# Altium PCB PCB.PcbDoc (part 1 of 2)
Units mm, origin at the board's own origin, x right, y up, seen from the top; angles counter-clockwise.
Board outline 100 x 100.01 mm, 2 copper layers (Top Layer, Bottom Layer); 139 components, 84 nets, 470 pads, 423 vias.
Unrouted connection lines stored in the file: 64.
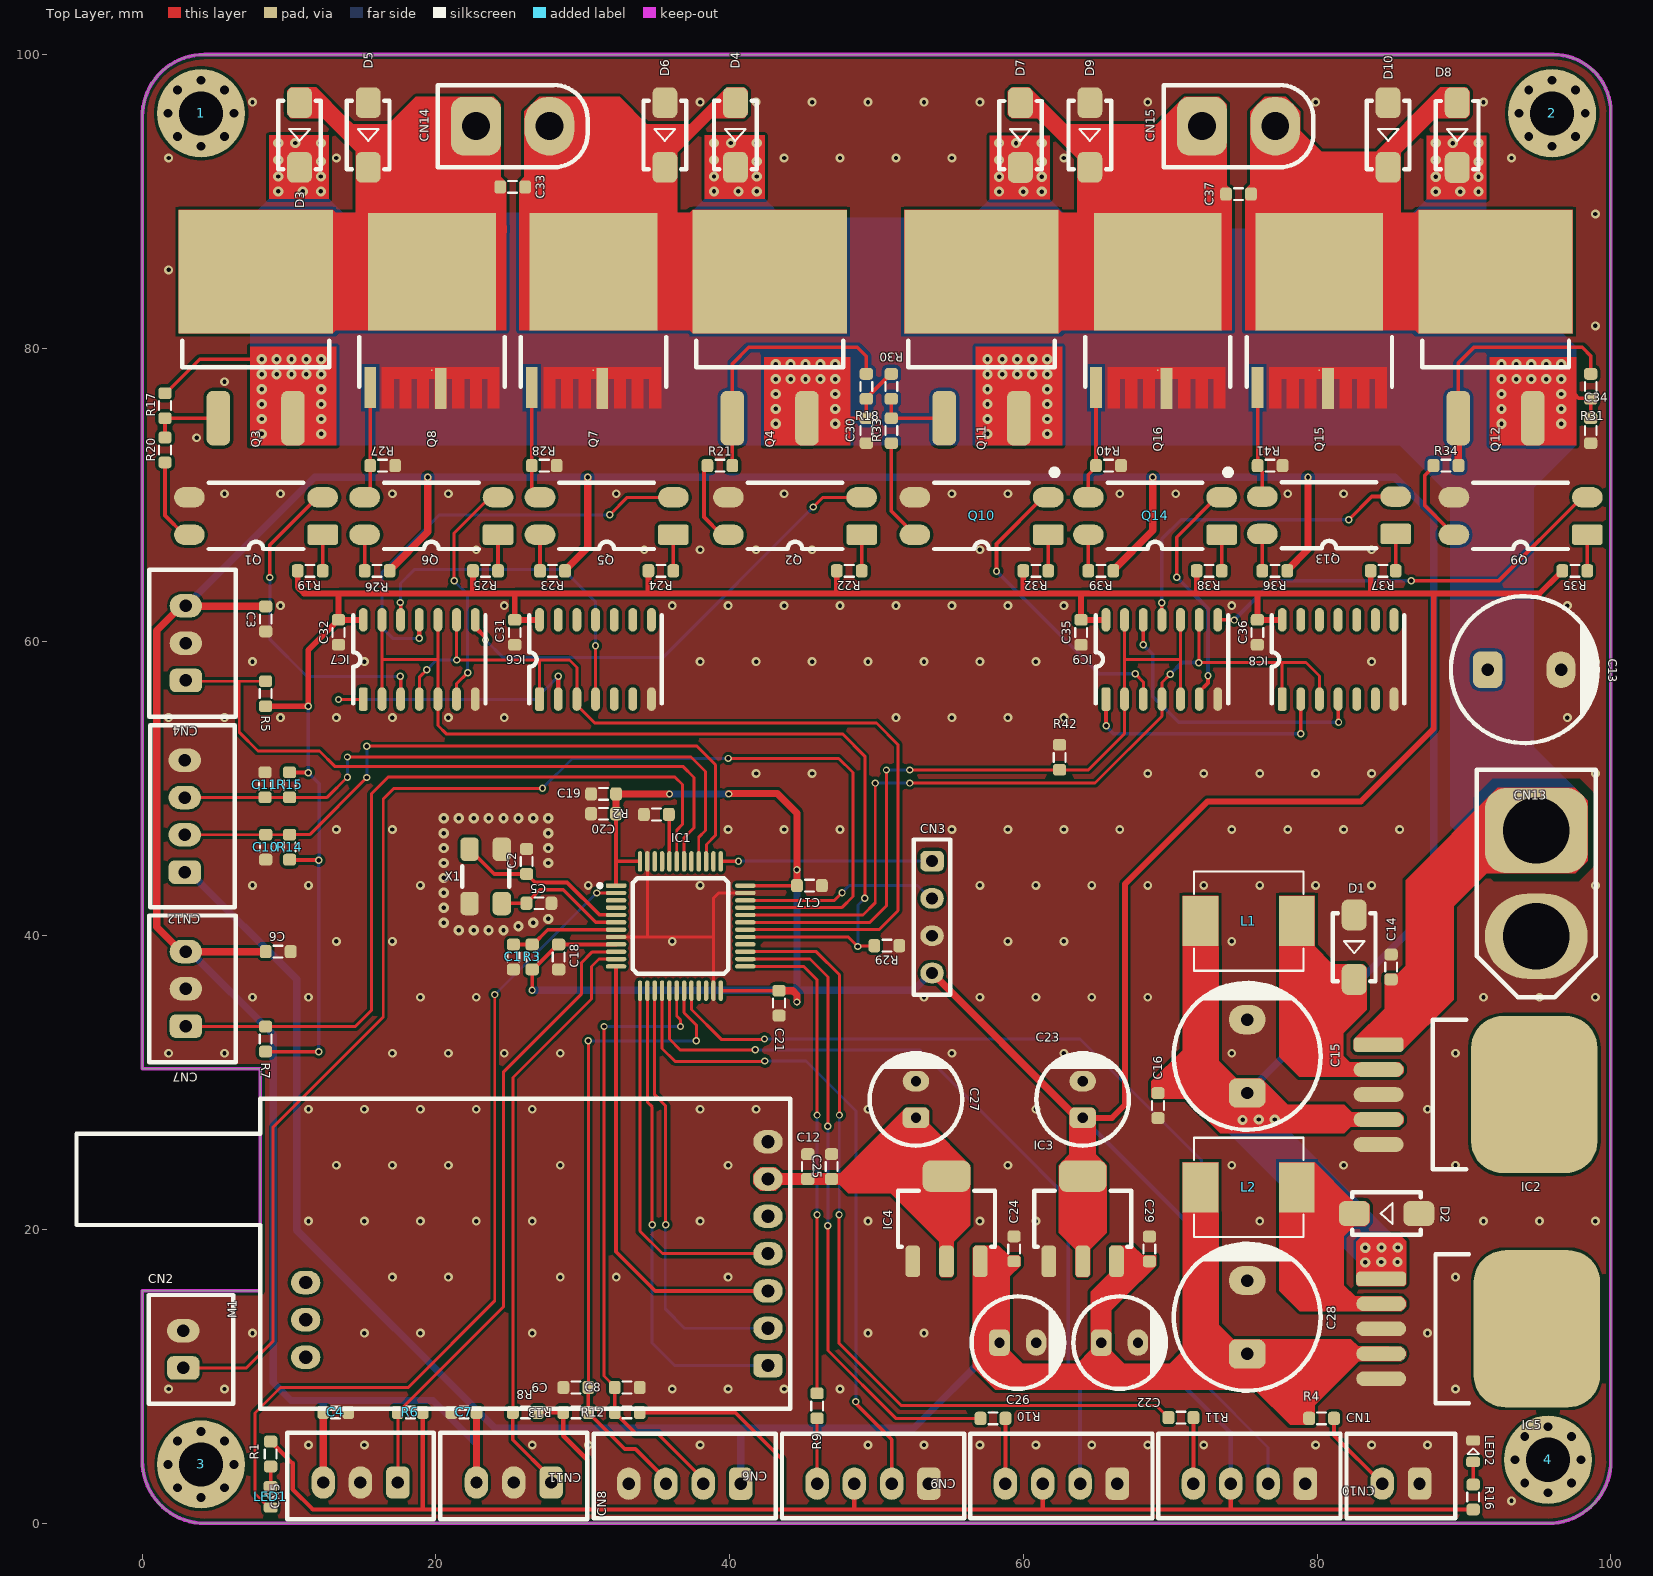
[diagram p0: Top Layer view]
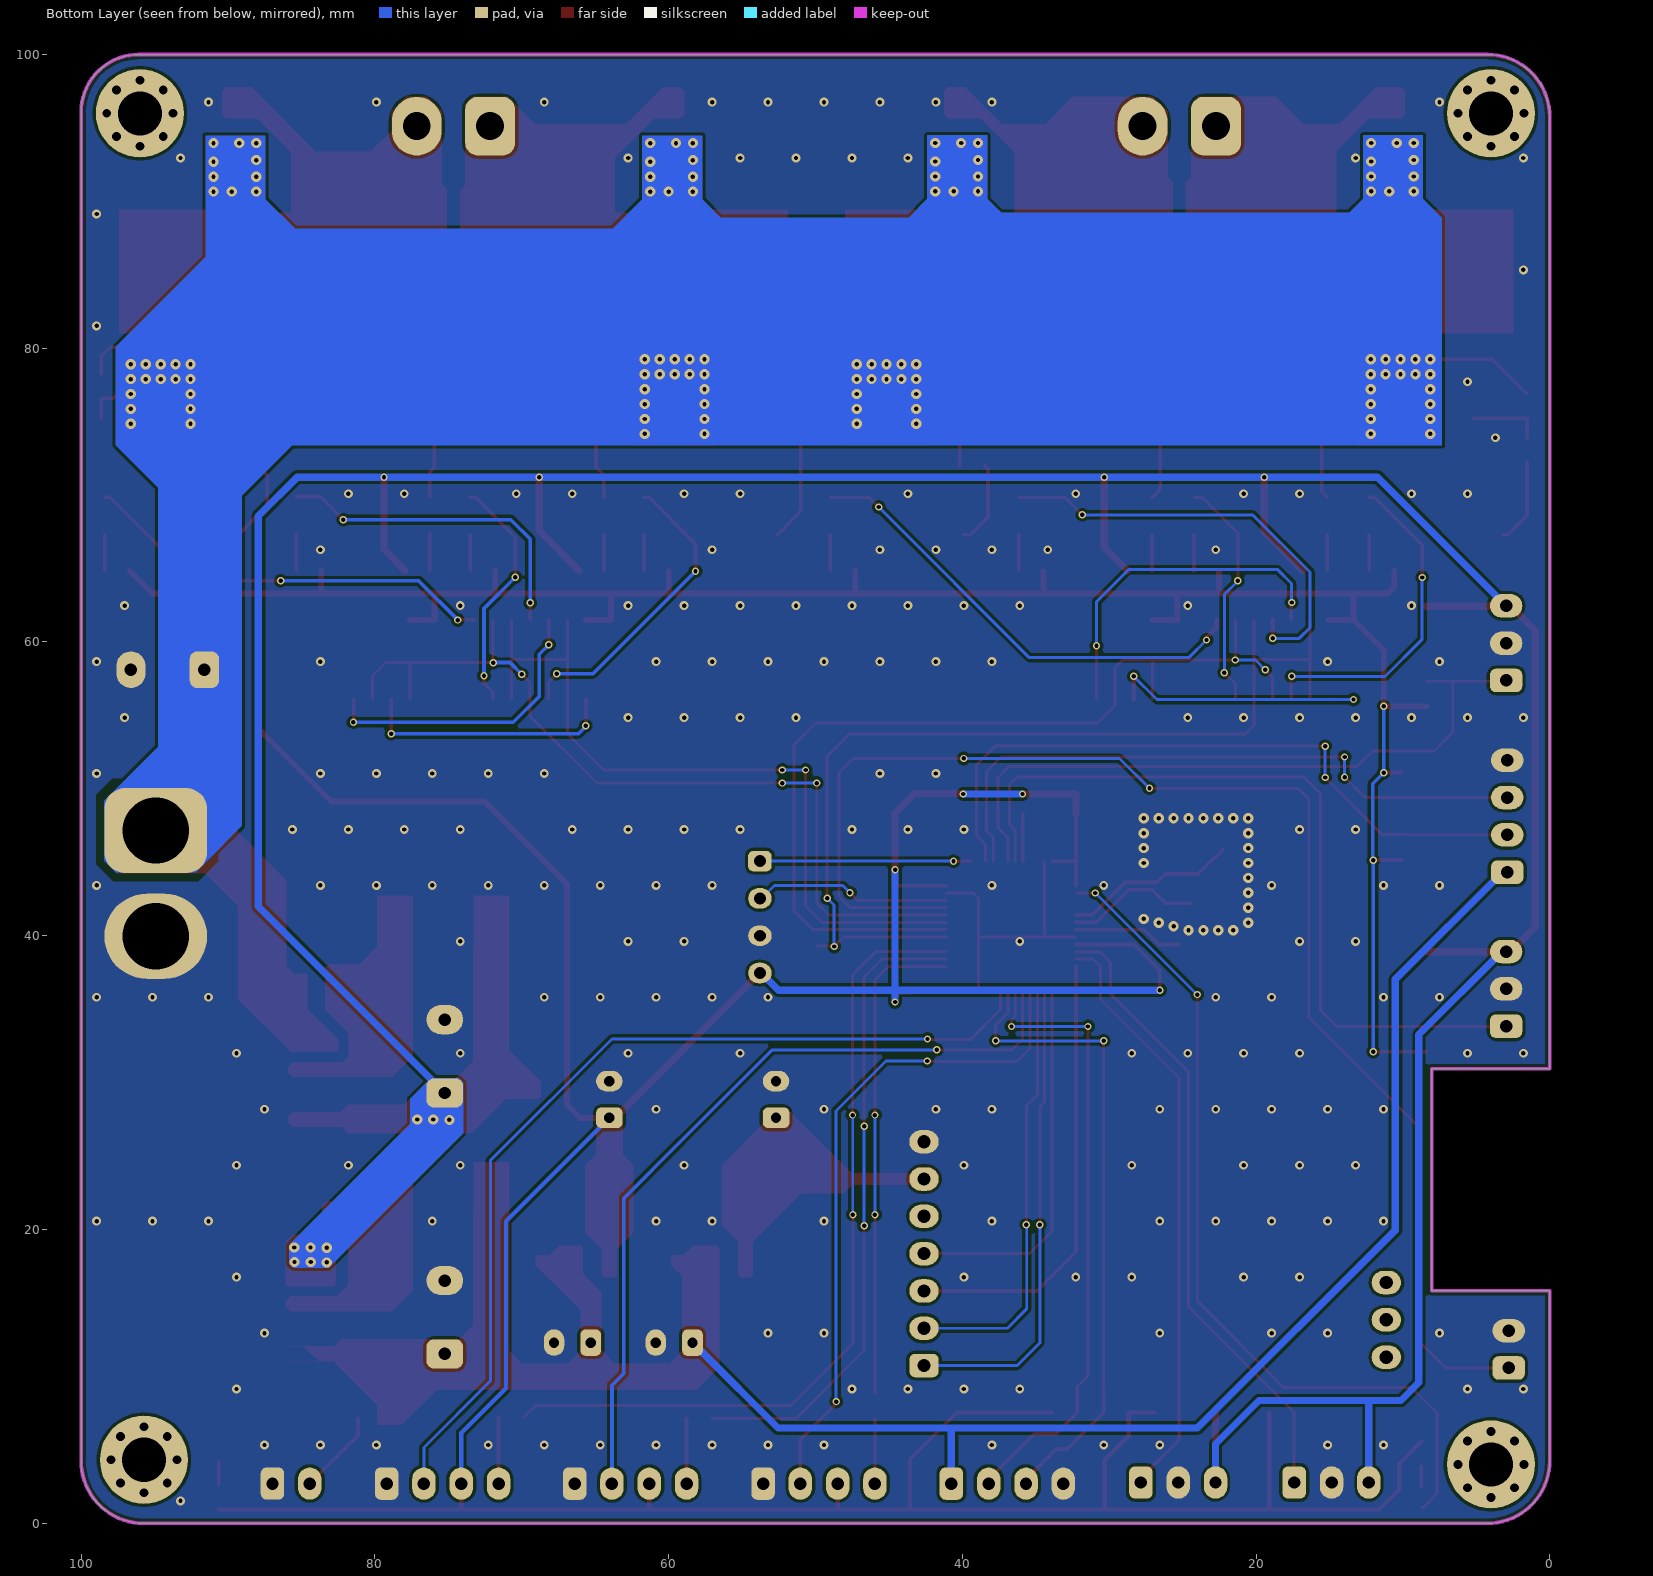
[diagram p1: Bottom Layer view, seen from below]
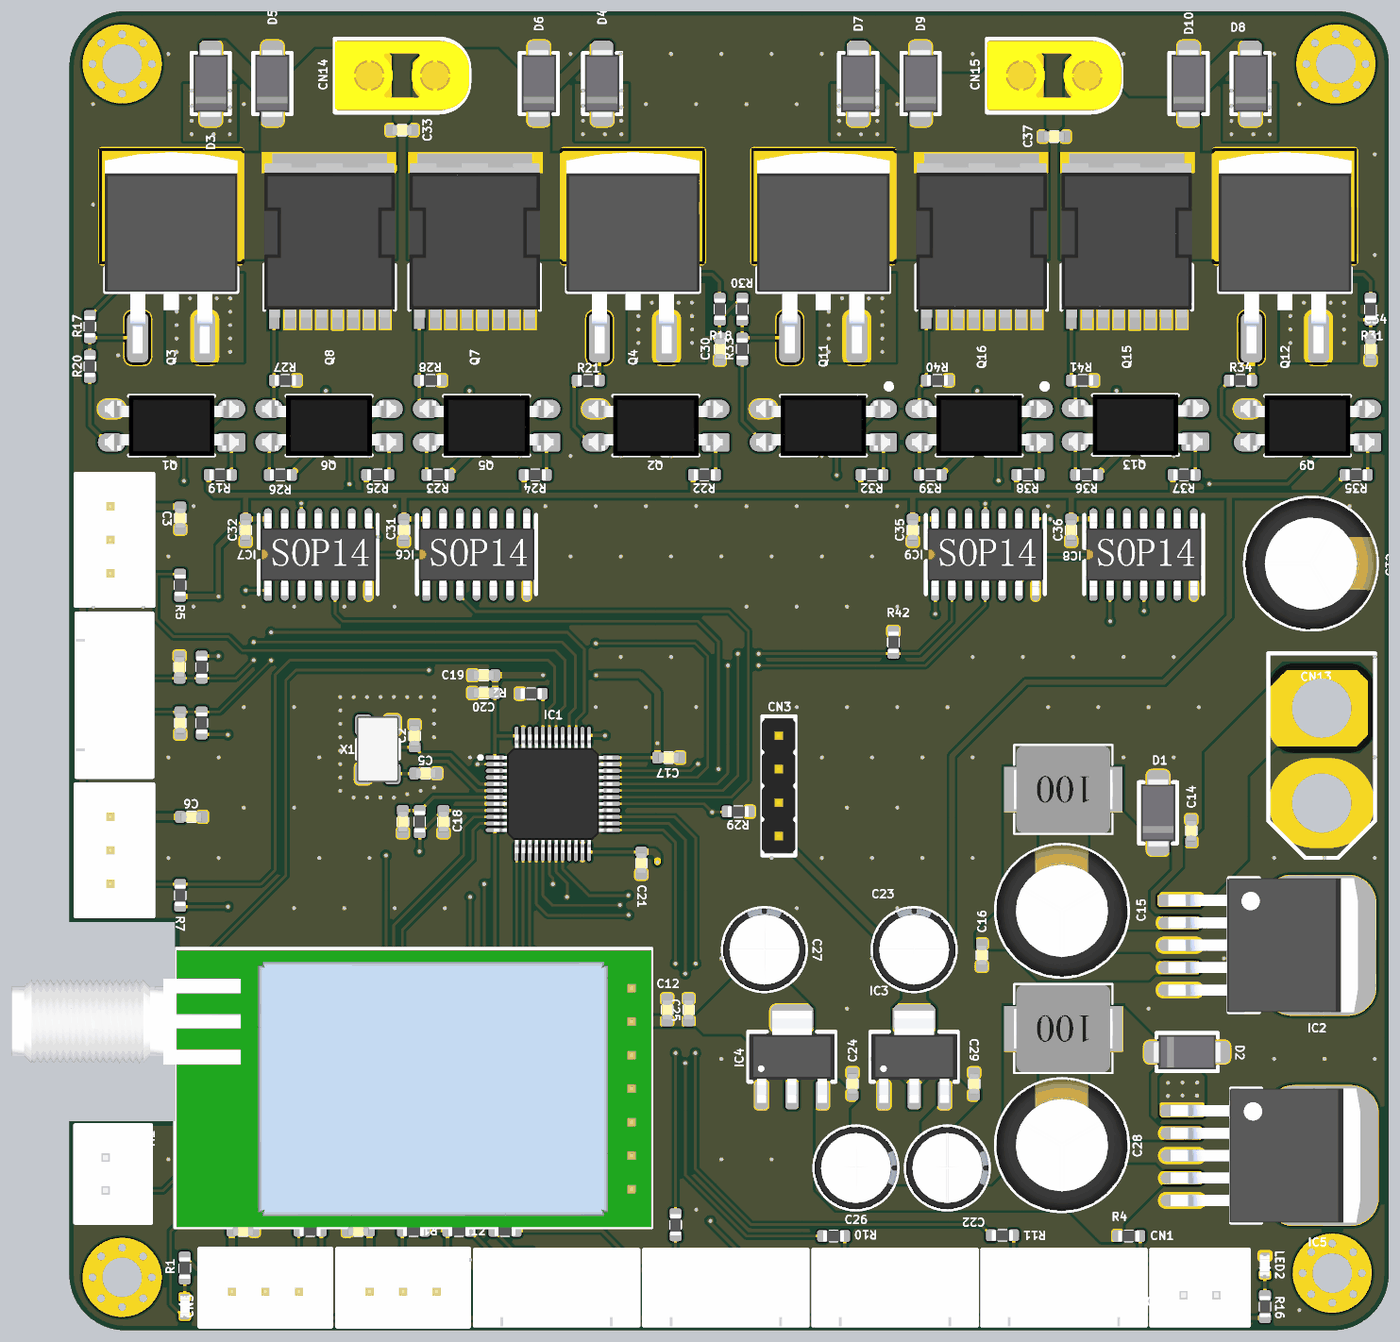
[diagram p3: 3D render of the assembled board from above, using the file's embedded part models]

## Layer stack, top to bottom
Top Solder: solder mask 0.0102, Solder Resist, Dk 3.5
Top Layer: signal copper 0.0356
Dielectric 1: dielectric 0.32, FR-4, Dk 4.8
Bottom Layer: signal copper 0.0356
Bottom Solder: solder mask 0.0102, Solder Resist, Dk 3.5

## Board outline
0,4.244 0,15.826 8.025,15.826 8.025,30.937 0,30.937 0,95.768 cw(c4.232,95.768) 4.232,100 96.086,100 cw(c96.086,96.086) 100,96.086 100,4.244 cw(c95.742,4.244) 95.742,-0.014 4.258,-0.014 cw(c4.258,4.244)

## Design rules (kind name [scope] priority, off if disabled: settings)
Clearance [All] p1: gap=0.2 ignorepadtopadclearanceinfootprint=FALSE
HoleSize [All] p1 off: absolutevalues=TRUE maxlimit=2.54 minlimit=0.025 maxpercent=80.000 minpercent=20.000
HoleToHoleClearance [All] p1 off: gap=0.254 allowstackedmicrovias=TRUE
LayerPairs [All] p1 off: enforce=TRUE
MinimumSolderMaskSliver [All] p1 off: minsoldermaskwidth=0.254
NetAntennae [All] p1 off: netantennaetolerance=0
PolygonConnect [All] p1: connectstyle=Direct reliefconductorwidth=0.254 reliefentries=4 polygonreliefangle="90 Angle" airgapwidth=0.254
RoutingVias [All] p1: holewidth=0.3 width=0.5 viastyle="Through Hole" minholewidth=0.3 minwidth=0.5 maxholewidth=0.3 maxwidth=0.5
SilkToSilkClearance [All] p1 off: silktosilkclearance=0.254
SilkToSolderMaskClearance [IsPad] p1 off: minsilkscreentomaskgap=0.254 clearancetoexposedcopper=TRUE
SolderMaskExpansion [All] p1: expansion=0.102 istentingtop=FALSE
Width Width_1 [InNetClass('PWR')] p1: maxlimit=1 minlimit=0.25 preferedwidth=0.5
Width [All] p2: maxlimit=0.5 minlimit=0.2 preferedwidth=0.25
23 further rules are at their usual default settings.

## Classes and differential pairs
component class H_BRIGGE_1: C34 C35 C36 C37 CN15 D7 D8 D9 D10 IC8 IC9 Q9 Q12 Q13 Q16 R30 R31 R32 R33 R34 R35 R36 R37 R38 R39 R40 R41 R42
component class PWR: C13 C14 C15 C16 C17 C18 C19 C20 C21 C22 C23 C24 C25 C26 C27 C28 C29 CN13 D1 D2 IC2 IC3 IC4 IC5 L1 L2 LED2 R16
component class MCU: 1 2 3 4 C1 C2 C3 C4 C5 C6 C7 C8 C9 C10 C11 C12 CN1 CN2 CN3 CN4 CN5 CN6 CN7 CN8 CN9 CN10 CN11 CN12 IC1 LED1 M1 R1 R2 R3 R4 R5 R6 R7 R8 R9 R10 R11 R12 R13 R14 R15 X1
component class H_BRIGDE: C30 C31 C32 C33 CN14 D3 D4 D5 D6 IC6 IC7 Q1 Q2 Q3 Q4 Q5 Q6 Q7 Q8 R17 R18 R19 R20 R21 R22 R23 R24 R25 R26 R27 R28 R29

## Components (designator, comment, footprint, x,y, rotation, side; value= is the part's Value field where it differs from the comment)
1 "M3" "Screw hole M3" 4,96 r90 top
2 "M3" "Screw hole M3" 96,96 r90 top
3 "M3" "Screw hole M3" 4,4 r90 top
4 "M3" "Screw hole M3" 95.722,4.318 r90 top
C1 "100nF" CAP-0603-2 25.274,38.552 r270 top
C2 "22pF" CAP-0603-2 26.17,45.054 r90 top
C3 "100nF" CAP-0603-2 8.407,61.57 r270 top
C4 "100nF" CAP-0603-2 13.169,7.537 r0 top
C5 "22pF" CAP-0603-2 27.009,42.21 r0 top
C6 "100nF" CAP-0603-2 9.25,38.919 r0 top
C7 "100nF" CAP-0603-2 21.908,7.537 r180 top
C8 "1nF" CAP-0603-2 33.02,9.237 r0 top
C9 "1nF" CAP-0603-2 29.527,9.237 r180 top
C10 "1nF" CAP-0603-2 8.407,46.032 r270 top
C11 "1nF" CAP-0603-2 8.357,50.274 r90 top
C12 "100nF" CAP-0603-2 45.314,24.283 r90 top
C13 "1000uF" Plugin,D10xL20mm 94.107,58.115 r0 top
C14 "100nF" CAP-0603-2 85.039,37.868 r90 top
C15 "1000uF" Plugin,D10xL20mm 75.235,31.79 r90 top
C16 "100nF" CAP-0603-2 69.164,28.434 r270 top
C17 "100nF" CAP-0603-2 45.427,43.41 r0 top
C18 "100nF" CAP-0603-2 28.355,38.552 r270 top
C19 "100nF" CAP-0603-2 31.411,49.652 r180 top
C20 "100nF" CAP-0603-2 31.411,48.306 r180 top
C21 "100nF" CAP-0603-2 43.358,35.41 r270 top
C22 "220uF" PLUGIN,D6.3xL12mm 66.548,12.294 r0 top
C23 "220uF" PLUGIN,D6.3xL12mm 64.033,28.849 r90 top
C24 "100nF" CAP-0603-2 59.36,18.676 r90 top
C25 "100nF" CAP-0603-2 46.939,24.283 r90 top
C26 "220uF" PLUGIN,D6.3xL12mm 59.619,12.294 r0 top
C27 "220uF" PLUGIN,D6.3xL12mm 52.68,28.849 r90 top
C28 "1000uF" Plugin,D10xL20mm 75.235,14.021 r90 top
C29 "100nF" CAP-0603-2 68.58,18.669 r90 top
C30 "100nF" CAP-0603-2 49.301,74.387 r270 top
C31 "100nF" CAP-0603-2 25.363,60.66 r270 top
C32 "100nF" CAP-0603-2 13.363,60.66 r270 top
C33 "100nF" CAP-0603-2 25.222,90.983 r180 top
C34 "100nF" CAP-0603-2 98.628,74.387 r270 top
C35 "100nF" CAP-0603-2 63.928,60.66 r270 top
C36 "100nF" CAP-0603-2 75.928,60.66 r270 top
C37 "100nF" CAP-0603-2 74.646,90.5 r180 top
CN1 "XH2.54-2P" Plugin,P=2.54mm,2P 85.7,2.698 r180 top
CN2 "XH2.54-2P" Plugin,P=2.54mm,2P 2.794,11.836 r90 top
CN3 "PH2.54-4P" "Plugin,P=2.54mm,4P,Pin Headers" 53.78,41.27 r270 top
CN4 "XH2.54-3P" Plugin,P=2.54mm,3P 2.969,59.919 r90 top
CN5 "XH2.54-3P" Plugin,P=2.54mm,3P 14.859,2.769 r180 top
CN6 "XH2.54-4P" Plugin,P=2.54mm,4P 49.759,2.692 r180 top
CN7 "XH2.54-3P" Plugin,P=2.54mm,3P 2.969,36.379 r90 top
CN8 "XH2.54-3P" Plugin,P=2.54mm,3P 25.298,2.769 r180 top
CN9 "XH2.54-4P" Plugin,P=2.54mm,4P 62.586,2.692 r180 top
CN10 "XH2.54-4P" Plugin,P=2.54mm,4P 75.387,2.692 r180 top
CN11 "XH2.54-4P" Plugin,P=2.54mm,4P 36.932,2.692 r180 top
CN12 "XH2.54-4P" Plugin,P=2.54mm,4P 2.894,48.14 r90 top
CN13 "XT60PB-M.G.Y" XT60PB-M.G.Y 94.92,43.561 r90 top
CN14 "XT30UPB-M" XT30UPB-M 25.222,95.123 r0 top
CN15 "XT30UPB-M" XT30UPB-M 74.646,95.123 r0 top
D1 "SS34" SMA(DO-214AC) 82.525,39.218 r270 top
D2 "SS34" SMA(DO-214AC) 84.725,21.082 r180 top
D3 "SS34" SMA(DO-214AC) 10.713,94.521 r270 top
D4 "SS34" SMA(DO-214AC) 40.383,94.521 r270 top
D5 "SS34" SMA(DO-214AC) 15.387,94.521 r270 top
D6 "SS34" SMA(DO-214AC) 35.583,94.521 r270 top
D7 "SS34" SMA(DO-214AC) 59.792,94.513 r270 top
D8 "SS34" SMA(DO-214AC) 89.535,94.513 r270 top
D9 "SS34" SMA(DO-214AC) 64.517,94.521 r270 top
D10 "SS34" SMA(DO-214AC) 84.836,94.521 r270 top
IC1 "STM32F103C8T6" LQFP-48(7x7) 36.661,40.66 r0 top
IC2 "LM2576S-12" TO-263-5L 89.484,29.185 r0 top
IC3 "AMS1117-3.3V" SOT-223 64.033,20.726 r90 top
IC4 "AMS1117-3.3V" SOT-223 54.762,20.726 r90 top
IC5 "LM2576S-5.0" TO-263-5L 89.662,13.233 r0 top
IC6 "74HC04" SOP-14 30.863,58.81 r90 top
IC7 "74HC00" SOP-14 18.863,58.81 r90 top
IC8 "74HC04" SOP-14 81.428,58.81 r90 top
IC9 "74HC00" SOP-14 69.428,58.81 r90 top
L1 "10uH" "Inductor 4.5A 10uH 0630" 75.336,40.996 r0 top
L2 "10uH" "Inductor 4.5A 10uH 0630" 75.336,22.86 r0 top
LED1 "RED" LED-0603 8.744,1.788 r270 top
LED2 "RED" LED-0603 90.625,4.902 r90 top
M1 "E32" E32-TTL-100 44.125,18.353 r90 top
Q1 "PC817" SOP-4 7.747,68.58 r180 top
Q2 "PC817" SOP-4 44.45,68.58 r180 top
Q3 "IRF4905S" TO-263#1 7.722,80.217 r90 top
Q4 "IRF4905S" TO-263#2 42.722,80.217 r90 top
Q5 "PC817" SOP-4 31.623,68.58 r180 top
Q6 "PC817" SOP-4 19.685,68.58 r180 top
Q7 "SFT018N100C3" TOLL 30.722,82.567 r90 top
Q8 "SFT018N100C3" TOLL 19.722,82.567 r90 top
Q9 "PC817" SOP-4 93.853,68.58 r180 top
Q10 "PC817" SOP-4 57.15,68.58 r180 top
Q11 "IRF4905S" TO-263#2 57.146,80.217 r90 top
Q12 "IRF4905S" TO-263#2 92.146,80.217 r90 top
Q13 "PC817" SOP-4 80.806,68.631 r180 top
Q14 "PC817" SOP-4 68.961,68.58 r180 top
Q15 "SFT018N100C3" TOLL 80.146,82.567 r90 top
Q16 "SFT018N100C3" TOLL 69.146,82.567 r90 top
R1 "1K" RES-0603-1 8.744,4.709 r270 top
R2 "10K" RES-0603-1 35.01,48.255 r180 top
R3 "10K" RES-0603-1 26.551,38.552 r270 top
R4 "1K" RES-0603-1 80.301,7.137 r0 top
R5 "10K" RES-0603-1 8.396,56.478 r270 top
R6 "10K" RES-0603-1 18.249,7.537 r0 top
R7 "10K" RES-0603-1 8.4,32.964 r270 top
R8 "10K" RES-0603-1 26.086,7.537 r0 top
R9 "1K" RES-0603-1 45.949,7.987 r270 top
R10 "1K" RES-0603-1 57.926,7.137 r0 top
R11 "1K" RES-0603-1 70.727,7.188 r0 top
R12 "10K" RES-0603-1 33.02,7.537 r0 top
R13 "10K" RES-0603-1 29.519,7.537 r180 top
R14 "10K" RES-0603-1 10.033,46.032 r270 top
R15 "10K" RES-0603-1 10.033,50.274 r90 top
R16 "1K" RES-0603-1 90.625,1.778 r270 top
R17 "10K" RES-0603-1 1.549,76.087 r90 top
R18 "10K" RES-0603-1 49.301,77.406 r270 top
R19 "220R" RES-0603-1 11.437,64.846 r180 top
R20 "4.7K" RES-0603-1 1.549,73.076 r90 top
R21 "4.7K" RES-0603-1 39.331,72.009 r180 top
R22 "220R" RES-0603-1 48.14,64.846 r0 top
R23 "680R" RES-0603-1 27.933,64.846 r0 top
R24 "220R" RES-0603-1 35.313,64.846 r0 top
R25 "220R" RES-0603-1 23.375,64.846 r180 top
R26 "680R" RES-0603-1 15.995,64.846 r0 top
R27 "6.8K" RES-0603-1 16.372,72.009 r180 top
R28 "6.8K" RES-0603-1 27.372,72.009 r180 top
R29 "10K" RES-0603-1 50.698,39.319 r180 top
R30 "10K" RES-0603-1 51.003,77.406 r90 top
R31 "10K" RES-0603-1 98.628,77.406 r270 top
R32 "220R" RES-0603-1 60.84,64.846 r180 top
R33 "4.7K" RES-0603-1 51.003,74.387 r90 top
R34 "4.7K" RES-0603-1 88.773,72.009 r180 top
R35 "220R" RES-0603-1 97.543,64.846 r0 top
R36 "680R" RES-0603-1 77.116,64.846 r0 top
R37 "220R" RES-0603-1 84.496,64.846 r0 top
R38 "220R" RES-0603-1 72.651,64.846 r180 top
R39 "680R" RES-0603-1 65.271,64.846 r0 top
R40 "6.8K" RES-0603-1 65.796,72.009 r180 top
R41 "6.8K" RES-0603-1 76.796,72.009 r180 top
R42 "10K" RES-0603-1 62.459,52.146 r270 top
X1 "8MHz" SMD5032-4P 23.383,44.041 r270 top

## Footprints (in the part's own frame and the unit in brackets; to place one, negate y for a bottom-side part, rotate by r counter-clockwise, add the part's x,y. Pads: shape width x height; smd on the part's side, far side on the other; paste and mask are expansions set on the pad)
CAP-0603-2 [mm]
  rrect50% 0.8x0.9 smd: 1(-0.85,0) 2(0.85,0)
  silkscreen extent -0.3,-0.4 0.3,0.4, body extent -0.8,-0.4 0.8,0.4, height 0.8
E32-TTL-100 [mm]
  rrect50% 1.6x2 hole 0.9: 1(-7.62,1.52)
  oval 1.6x2 hole 0.9: 2(-5.08,1.52) 3(-2.54,1.52) 4(0,1.52) 5(2.54,1.52) 6(5.08,1.52) 7(7.62,1.52) 8(-1.97,33) 9(-4.51,33) 10(-7.05,33)
  silkscreen extent -10.55,0 10.55,48.6, body extent -10.55,0 10.45,48.5, height 8.1
"Inductor 4.5A 10uH 0630" [mm] "4.5A 10uH ±20% 5.5A 68mO Molded Inductor SMD,7.3x6.6mm Fixed Inductors RoHS"
  rect 2.424x3.42 smd paste+0 mask+0.051: 1(3.278,0) 2(-3.278,0)
  silkscreen extent -3.73,-3.38 3.73,3.38, body extent -3.75,-3.3 3.75,3.3, height 2.85
LED-0603 [mm]
  rrect50% 0.7x0.95 smd paste-0.1: 1(-0.725,0) 2(0.725,0)
  silkscreen extent -0.2,-0.41 0.2,0.4, body extent -0.82,-0.35 0.82,0.38, height 0.68
LQFP-48(7x7) [mm]
  rrect50% 1.4x0.3 smd: 1(-4.4,2.75)
  oval 1.4x0.3 smd: 2(-4.4,2.25) 3(-4.4,1.75) 4(-4.4,1.25) 5(-4.4,0.75) 6(-4.4,0.25) 7(-4.4,-0.25) 8(-4.4,-0.75) 9(-4.4,-1.25) 10(-4.4,-1.75) 11(-4.4,-2.25) 12(-4.4,-2.75) 25(4.4,-2.75) 26(4.4,-2.25) 27(4.4,-1.75) 28(4.4,-1.25) 29(4.4,-0.75) 30(4.4,-0.25) 31(4.4,0.25) 32(4.4,0.75) 33(4.4,1.25) 34(4.4,1.75) 35(4.4,2.25) 36(4.4,2.75)
  oval 0.3x1.4 smd: 13(-2.768,-4.4) 14(-2.268,-4.4) 15(-1.768,-4.4) 16(-1.268,-4.4) 17(-0.768,-4.4) 18(-0.268,-4.4) 19(0.232,-4.4) 20(0.732,-4.4) 21(1.232,-4.4) 22(1.732,-4.4) 23(2.232,-4.4) 24(2.732,-4.4) 37(2.732,4.4) 38(2.232,4.4) 39(1.732,4.4) 40(1.232,4.4) 41(0.732,4.4) 42(0.232,4.4) 43(-0.268,4.4) 44(-0.768,4.4) 45(-1.268,4.4) 46(-1.768,4.4) 47(-2.268,4.4) 48(-2.768,4.4)
  silkscreen extent -5.6,-3.25 3.25,3.25, body extent -4.5,-4.5 4.5,4.5, height 1.6
PLUGIN,D6.3xL12mm [mm]
  rrect50% 1.4x1.8 hole 0.7: 1(-1.25,0)
  oval 1.4x1.8 hole 0.7: 2(1.25,0)
  silkscreen extent -3.15,-3.15 3.15,3.15, body extent -3.15,-3.15 3.15,3.15, height 12
Plugin,D10xL20mm [mm]
  rrect50% 2x2.5 hole 0.85 mask+0.2: 1(-2.5,0)
  oval 2x2.5 hole 0.85 mask+0.2: 2(2.5,0)
  silkscreen extent -5,-5 5,5, body extent -5,-5 5,5, height 20
Plugin,P=2.54mm,2P [mm]
  rrect50% 1.6x2.2 hole 0.85 mask+0.1: 1(-1.27,0)
  oval 1.6x2.2 hole 0.85 mask+0.1: 2(1.27,0)
  silkscreen extent -3.7,-3.4 3.7,2.35, body extent -3.71,-3.4 3.71,2.33, height 3.05
Plugin,P=2.54mm,3P [mm]
  rrect50% 1.6x2.2 hole 0.85 mask+0.1: 1(-2.54,0)
  oval 1.6x2.2 hole 0.85 mask+0.1: 2(0,0) 3(2.54,0)
  silkscreen extent -5,-3.4 5,2.5, body extent -5.04,-3.3 5.04,2.4, height 7
Plugin,P=2.54mm,4P [mm]
  rrect50% 1.6x2.2 hole 0.85 mask+0.1: 1(-3.81,0)
  oval 1.6x2.2 hole 0.85 mask+0.1: 2(-1.27,0) 3(1.27,0) 4(3.81,0)
  silkscreen extent -6.2,-3.4 6.2,2.35, body extent -6.25,-3.4 6.25,2.4, height 7
"Plugin,P=2.54mm,4P,Pin Headers" [mm]
  rrect50% 1.4x1.6 hole 0.8 mask+0.15: 1(-3.81,0)
  oval 1.4x1.6 hole 0.8 mask+0.15: 2(-1.27,0) 3(1.27,0) 4(3.81,0)
  silkscreen extent -5.28,-1.25 5.28,1.25, body extent -5.08,-1.29 5.08,1.25, height 8.89
RES-0603-1 [mm]
  rrect50% 0.8x0.9 smd: 1(-0.85,0) 2(0.85,0)
  silkscreen extent -0.3,-0.4 0.3,0.4, body extent -0.8,-0.4 0.8,0.4, height 0.45
"Screw hole M3" [mm]
  round 0.6 hole 0.6: ""(-2.25,0) ""(-1.591,1.591) ""(-1.591,-1.591) ""(0,2.25) ""(0,-2.25) ""(1.591,1.591) ""(1.591,-1.591) ""(2.25,0)
  round 6 hole 3 mask+0.1: ""(0,0)
SMA(DO-214AC) [mm]
  rrect50% 2.1x1.7 smd: 1(-2.2,0) 2(2.2,0)
  silkscreen extent -2.32,-1.45 2.32,1.45, body extent -2.6,-1.3 2.6,1.3, height 2.44
SMD5032-4P [mm]
  rrect50% 1.6x1.25 smd: 1(-1.85,-1.1) 2(1.85,-1.1) 3(1.85,1.1) 4(-1.85,1.1)
  silkscreen extent -0.7,-1.6 0.7,1.6, body extent -2.5,-1.6 2.5,1.6, height 0.85
SOP-4 [mm]
  rrect25% 2.09x1.39 smd: 1(-4.54,1.27)
  oval 2.09x1.39 smd: 2(-4.54,-1.27) 3(4.54,-1.27) 4(4.54,1.27)
  silkscreen extent -3.22,-2.25 3.22,2.25, body extent -5.08,-2.3 5.08,2.3, height 3.78
SOP-14 [mm]
  rrect50% 1.6x0.6 smd: 1(-2.7,3.81)
  oval 1.6x0.6 smd: 2(-2.7,2.54) 3(-2.7,1.27) 4(-2.7,0) 5(-2.7,-1.27) 6(-2.7,-2.54) 7(-2.7,-3.81) 8(2.7,-3.81) 9(2.7,-2.54) 10(2.7,-1.27) 11(2.7,0) 12(2.7,1.27) 13(2.7,2.54) 14(2.7,3.81)
  silkscreen extent -3,-4.51 3,4.51, body extent -3.12,-4.38 3.12,4.38, height 1.39
SOT-223 [mm]
  rrect50% 2.15x1 smd: 1(-2.9,2.3) 2(-2.9,0) 3(-2.9,-2.3)
  rrect50% 2.15x3.25 smd: 4(2.9,0)
  silkscreen extent -1.9,-3.3 1.9,3.3, body extent -3.5,-3.25 3.5,3.25, height 1.8
TO-263#1 [mm]
  rrect50% 3.7x1.6 smd mask+0.3: 1(-4.98,2.54) 3(-4.98,-2.54)
  rect 8.4x10.5 smd paste-5 mask+0.3: ""(5,0)
  silkscreen extent -1.5,-5 0.3,5, body extent -6.15,-5.03 9.09,5.03, height 4.83
TO-263#2 [mm]
  rrect50% 3.7x1.6 smd mask+0.3: 1(-4.98,2.54) 3(-4.98,-2.54)
  rect 8.4x10.5 smd paste-5 mask+0.3: 2(5,0)
  silkscreen extent -1.5,-5 0.3,5, body extent -6.15,-5.03 9.09,5.03, height 4.83
TO-263-5L [mm]
  rrect50% 3.4x1 smd paste-0.05 mask+0.15: 1(-5.3,3.4)
  oval 3.4x1 smd paste-0.05 mask+0.15: 2(-5.3,1.7) 3(-5.3,0) 4(-5.3,-1.7) 5(-5.3,-3.4)
  rrect50% 8.6x10.7 smd paste-0.05 mask+0.07: 6(5.3,0)
  silkscreen extent -1.61,-5.08 0.68,5.08, body extent -6.18,-5.08 8.18,5.08, height 4.65
TOLL [mm]
  rect 2.8x0.8 smd: 1(-5.25,4.2) 2(-5.3,-0.6)
  rect 0.1x0.1 smd paste-1 mask+0: 2(-4.05,0) 3(0,0)
  rect 8x8.7 smd: 3(2.65,0)
  Top Layer region: -3.85,-4.6 -6.65,-4.6 -6.65,-3.8 -4.65,-3.8 -4.65,-3.4 -6.65,-3.4 -6.65,-2.6 -4.65,-2.6 -4.65,-2.2 -6.65,-2.2 -6.65,-1.4 -4.65,-1.4 -4.65,-1 -6.65,-1 -6.65,-0.2 -4.65,-0.2 -4.65,0.2 -6.65,0.2 -6.65,1 -4.65,1 -4.65,1.4 -6.65,1.4 -6.65,2.2 -4.65,2.2 -4.65,2.6 -6.65,2.6 -6.65,3.4 -3.85,3.4
  Top Layer region: 6.65,-5.05 5.25,-5.05 5.25,-4.35 2.35,-4.35 2.35,-4.85 -1.35,-4.85 -1.35,4.85 2.35,4.85 2.35,4.35 5.25,4.35 5.25,5.05 6.65,5.05
  silkscreen extent -5.2,-4.95 -1.8,4.95, body extent -5.79,-4.95 5.89,4.95, height 2.31
XT30UPB-M [mm]
  rrect50% 3.4x4 hole 1.9: 1(-2.5,0)
  oval 3.4x4 hole 1.9: 2(2.5,0)
  silkscreen extent -5.1,-2.8 5.1,2.8, body extent -5.1,-2.6 5.1,2.6, height 10.7
XT60PB-M.G.Y [mm]
  rrect50% 5.8x7 hole 4.5 mask+0.5: 1(3.6,0)
  oval 5.8x7 hole 4.5 mask+0.5: 2(-3.6,0)
  silkscreen extent -7.75,-4.05 7.75,4.05, body extent -8,-4 8,4, height 16.1

## Part data
1 2 3 4: library part "Screw hole M3"
C1 C3 C4 C6 C7 C12 C14 C16 C17 C18 C19 C20 C21 C24 C25 C29 C30 C31 C32 C33 C34 C35 C36 C37: library part CL10B104KB8NNNC, "100nF ±10% 50V Ceramic Capacitor X7R 0603", DigiKey Part Number=1276-1000-2-ND, LCSC Part #=C1591, Manufacturer="Samsung Electro-Mechanics", Package=0603, ComponentLink1Description=Link, ComponentLink1URL=https://www.lcsc.com/product-detail/C1591.html?s_z=n_CL10B104KB8NNC, ComponentLink2Description="Link 1", ComponentLink2URL=https://www.digikey.com/en/products/detail/samsung-electro-mechanics/CL10B104KB8NNNC/3886658?s=N4IgTCBcDaIMIBkCMAGAQqgLAaTQDgDki4QBdAXyA, Mfr.Part #=CL10B104KB8NNNC
C2 C5: library part CC0603JRNPO9BN220, "22pF ±5% 50V Ceramic Capacitor NP0 0603", DigiKey Part Number=311-1062-2-ND, LCSC Part #=C105620, Manufacturer=YAGEO, Package=0603, ComponentLink1Description=Link, ComponentLink1URL=https://www.lcsc.com/product-detail/C105620.html?s_z=n_CC0603JRNPO9BN220, ComponentLink2Description="Link 1", ComponentLink2URL=https://www.digikey.com/en/products/detail/yageo/CC0603JRNPO9BN220/302796?s=N4IgTCBcDaIMJwAwDZEGYBSAlAcgBQHkBOAIRzDERAF0BfIA, Mfr.Part #=CC0603JRNPO9BN220
C8 C9 C10 C11: library part CC0603KRX7R9BB102, "1nF ±10% 50V Ceramic Capacitor X7R 0603", DigiKey Part Number=311-1080-2-ND, LCSC Part #=C100040, Manufacturer=YAGEO, Package=0603, ComponentLink1Description=Link, ComponentLink1URL=https://www.lcsc.com/product-detail/C100040.html?s_z=n_C100040, ComponentLink2Description="Link 1", ComponentLink2URL=https://www.digikey.com/en/products/detail/yageo/CC0603KRX7R9BB102/302814?s=N4IgTCBcDaIMJwAwDZEGYDSAlAGgdiwE4AhYgRkQgF0BfIA, Mfr.Part #=CC0603KRX7R9BB102
C13 C15 C28: library part 35PX1000MEFC10X20, "1000uF 35V Aluminum Electrolytic Capacitors Through Hole,D10xL20mm 2000hrs@105℃", DigiKey Part Number=1189-1745-ND, LCSC Part #=C136014, Manufacturer=Rubycon, Package="Through Hole,D10xL20mm", ComponentLink1Description=Link, ComponentLink1URL=https://www.lcsc.com/product-detail/C136014.html?s_z=n_35PX1000MEFC10X20, ComponentLink2Description="Link 1", ComponentLink2URL=https://www.digikey.com/en/products/detail/rubycon/35PX1000MEFC10X20/3563769?s=N4IgTCBcDaIMwFYAKANAjABiwWQKIDEBhTFMDEAXQF8g, Mfr.Part #=35PX1000MEFC10X20, So_Chan_Cam=2
C22 C23 C26 C27: library part 25YXJ220M6.3X11, "220uF 25V Aluminum Electrolytic Capacitors Through Hole,D6.3xL11mm 7000hrs@105℃", DigiKey Part Number=1189-2913-ND, LCSC Part #=C88729, Manufacturer=Rubycon, Package="Through Hole,D6.3xL11mm", ComponentLink1Description=Link, ComponentLink1URL=https://www.lcsc.com/product-detail/C88729.html, ComponentLink2Description="Link 1", ComponentLink2URL=https://www.digikey.com/en/products/detail/rubycon/25YXJ220M6-3X11/3563124?s=N4IgTCBcDa4KwE0AaApMYAMBZAbAOgGYkBGYkAXQF8g, Mfr.Part #=25YXJ220M6.3X11
CN1 CN2: library part BX-XH2.54-2PZZ, "Connector Header 2 position 2.5mm Pitch 3A Through Hole -25℃~+85℃", DigiKey Part Number=NO, LCSC Part #=C18077833, Manufacturer=Bossie, Package="Through Hole,P=2.5mm", ComponentLink1Description=Link, ComponentLink1URL=https://www.lcsc.com/product-detail/C18077833.html?s_z=n_BX-XH2.54-2PZZ, Mfr.Part #=BX-XH2.54-2PZZ
CN3: library part PH2.54-1X4P-H25, "Pin Header 4 Position 2.54mm Pitch Single Row Through Hole -40℃~+105℃", DigiKey Part Number=NO, LCSC Part #=C42431808, Manufacturer=JXTCONN, Package=Plugin,P=2.54mm, Mfr.Part #=PH2.54-1X4P-H25
CN4 CN5 CN7 CN8: library part BX-XH2.54-3PZZ, "Connector Header 3 position 2.5mm Pitch 3A Through Hole -25℃~+85℃", DigiKey Part Number=NO, LCSC Part #=C18077834, Manufacturer=Bossie, Package="Through Hole,P=2.5mm", ComponentLink1Description=Link, ComponentLink1URL=https://www.lcsc.com/product-detail/C18077834.html?s_z=n_BX-XH2.54-3PZZ, Mfr.Part #=BX-XH2.54-3PZZ
CN6 CN9 CN10 CN11 CN12: library part BX-XH2.54-4PZZ, "Connector Header 4 position 2.5mm Pitch 3A Through Hole -25℃~+85℃", DigiKey Part Number=NO, LCSC Part #=C18077835, Manufacturer=Bossie, Package="Through Hole,P=2.5mm", ComponentLink1Description=Link, ComponentLink1URL=https://www.lcsc.com/product-detail/C18077835.html?s_z=n_BX-XH2.54-4PZZ, Mfr.Part #=BX-XH2.54-4PZZ
CN13: "Power Connectors RoHS", DigiKey Part Number=NO, LCSC Part #=C19268037, Manufacturer="Changzhou Amass Elec", Package="Through Hole", ComponentLink1Description=Link, ComponentLink1URL=https://www.lcsc.com/product-detail/C19268037.html?s_z=n_xt60, ComponentLink2Description="Link 1", Mfr.Part #=XT60PB-M.G.Y
CN14 CN15: "Banana and Tip Connector Adapters", DigiKey Part Number=NO, LCSC Part #=C428721, Manufacturer="Changzhou Amass Elec", Mfr.Part #=XT30PW-M30.G.Y, Package="Through Hole", ComponentLink1Description=Link, ComponentLink1URL=https://www.lcsc.com/product-detail/C431092.html?s_z=n_xt30, ComponentLink2Description="Link 1"
D1 D2 D3 D4 D5 D6 D7 D8 D9 D10: "Diode Independent 40V 3A Surface Mount SMA(DO-214AC)", DigiKey Part Number=NO, LCSC Part #=C908680, Manufacturer=GOODWORK, Package=SMA(DO-214AC), ComponentLink1Description=Link, ComponentLink1URL=https://www.lcsc.com/product-detail/C908680.html?s_z=n_C908680, Mfr.Part #=SS34
IC1: "ARM Cortex-M3 32 Bit 72MHz 37 LQFP-48(7x7) Microcontrollers RoHS", DigiKey Part Number=497-6063-ND, LCSC Part #=C8734, Manufacturer=ST, Package=LQFP-48(7x7), ComponentLink1Description=Link, ComponentLink1URL=https://www.lcsc.com/product-detail/C8734.html?s_z=n_STM32F103C8T6, ComponentLink2Description="Link 1", ComponentLink2URL=https://www.digikey.com/en/products/detail/stmicroelectronics/STM32F103C8T6/1646338, Mfr.Part #=STM32F103C8T6
IC2: "Buck Switching Regulator IC Fixed 12V 1 Output 3A TO-263-5L", DigiKey Part Number=NO, LCSC Part #=C22386541, Manufacturer="HXY MOSFET", Package=TO-263-5L, Mfr.Part #=LM2576S-12
IC3 IC4: "Linear Voltage Regulator IC Positive Fixed 1 Output 1A SOT-223", DigiKey Part Number=NO, LCSC Part #=C5120765, Manufacturer=MSKSEMI, Package=SOT-223, ComponentLink1Description=Link, ComponentLink1URL=https://www.lcsc.com/product-detail/C5120765.html?s_z=n_C5120765, Mfr.Part #=AMS1117-3.3V
IC5: "47kHz~58kHz Buck Adjustable 3.5A 5V TO-263-5L Voltage Regulators - DC DC Switching Regulators RoHS", DigiKey Part Number=NO, LCSC Part #=C5349983, Manufacturer="HXY MOSFET", Package=TO-263-5L, ComponentLink1Description=Link, ComponentLink1URL=https://www.lcsc.com/product-detail/C5349983.html?s_z=n_LM2576S-5.0, ComponentLink2Description="Link 1", Mfr.Part #=LM2576S-5.0
IC6 IC8: library part SN74HC04DR, "2V~6V 16ns@6V,50pF 2uA 6 1 SOIC-14 Gates and Inverters RoHS", DigiKey Part Number=296-1189-2-ND, LCSC Part #=C6811, Manufacturer=TI, Package=SOIC-14, ComponentLink1Description=Link, ComponentLink1URL=https://www.lcsc.com/product-detail/C6811.html?s_z=n_74HC04, ComponentLink2Description="Link 1", ComponentLink2URL=https://www.digikey.com/en/products/detail/texas-instruments/SN74HC04DR/276832, Mfr.Part #=SN74HC04DR
IC7 IC9: library part SN74HC00DR, "2uA 2V~6V 15ns@6V,50pF SOIC-14 Gates and Inverters RoHS", DigiKey Part Number=296-1187-2-ND, LCSC Part #=C10090, Manufacturer=TI, Package=SOIC-14, ComponentLink1Description=Link, ComponentLink1URL=https://www.lcsc.com/product-detail/C10090.html?s_z=n_74hc00, ComponentLink2Description="Link 1", ComponentLink2URL=https://www.digikey.com/en/products/detail/texas-instruments/SN74HC00DR/276830, Mfr.Part #=SN74HC00DR
L1 L2: library part "Inductor 4.5A 10uH 0630", "4.5A 10uH ±20% 5.5A 68mΩ Molded Inductor SMD,7.3x6.6mm Fixed Inductors RoHS", LCSC Part #=C128692, Manufacturer="Shun Xiang Nuo", MPN=SMMS0630-100M, ComponentLink1Description=Link, ComponentLink1URL=https://www.lcsc.com/product-detail/C128692.html?s_z=n_q_l_inductor%25200630&spm=wm.fly.bg.1.xh___wm.fly.tp.0.ml&lcsc_vid=Q1VfX1ReRFFaUFJSRgIIUV0CFFgIBFJfT1hdVlwEEVkxVlNRTlNdX1VST1JcVTsOAxUeFF5JWBYZEEoKFBINSQcJGk4%3D, Key Attributes="FIXED IND 10uH 68mΩ SMD,6.6x7.3mm", Link=https://www.lcsc.com/product-detail/C128692.html?s_z=n_q_l_inductor%25200630&spm=wm.fly.bg.1.xh___wm.fly.tp.0.ml&lcsc_vid=Q1VfX1ReRFFaUFJSRgIIUV0CFFgIBFJfT1hdVlwEEVkxVlNRTlNdX1VST1JcVTsOAxUeFF5JWBYZEEoKFBINSQcJGk4%3D, Packaging=SMD,7.3x6.6mm
LED1 LED2: library part YLED0603R, "25mA 1.8V~2.4V Red 0603 LED Indication - Discrete ROHS", DigiKey Part Number=NO, LCSC Part #=C19171390, Manufacturer=YONGYUTAI, Package=0603, ComponentLink1Description=Link, ComponentLink1URL=https://www.lcsc.com/product-detail/C19171390.html?s_z=n_C19171390, ComponentLink2Description="Link 1", Mfr.Part #=YLED0603R
M1: library part E32-TTL-100, "E32-TTL-100 is a 100mW wireless transceiver module with LoRa / spread-spectrum technology, operates at 410~441MHz (Default: 433MHz), based on original imported RFIC SX1278 from SEMTECH", DigiKey Part Number=NO, Manufacturer="Chengdu Ebyte Electronic", Package="Through Hole,P=2.54mm", ComponentLink1Description=Link, ComponentLink1URL=https://nshopvn.com/product/module-rf-sx1278-lora-e32/, LCSC Part #=NO, Mfr.Part #=E32-TTL-100
Q1 Q2 Q5 Q6 Q9 Q10 Q13 Q14: library part PC817C-S, "Phototransistor Output 5kVrms 1 Channel SOP-4-2.54mm", DigiKey Part Number=NO, LCSC Part #=C3008369, Manufacturer=UMW, Package=SOP-4-2.54mm, ComponentLink1Description=Link, ComponentLink1URL=https://www.lcsc.com/product-detail/C3008369.html?s_z=n_C3008369, ComponentLink2Description="Link 1", Mfr.Part #=PC817C-S
Q3 Q4 Q11 Q12: library part IRF4905STRLPBF, "P-Channel 55V 70A 170W Surface Mount D2PAK", DigiKey Part Number=IRF4905STRLPBFTR-ND, LCSC Part #=C2620, Manufacturer=Infineon, Package=D2PAK, ComponentLink1Description=Link, ComponentLink1URL=https://www.lcsc.com/product-detail/C2620.html?s_z=n_IRF4905S, ComponentLink2Description="Link 1", ComponentLink2URL=https://www.digikey.com/en/products/detail/infineon-technologies/IRF4905STRLPBF/1928283?s=N4IgTCBcDaIJICUBiAWAnABgKwGUAqCAMgAoBCSIAugL5A, Mfr.Part #=IRF4905STRLPBF
Q7 Q8 Q15 Q16: "N-Channel 100V 320A 312W Surface Mount TOLL", DigiKey Part Number=NO, LCSC Part #=C42395330, Manufacturer=SCILICON, Package=TOLL, ComponentLink1Description=Link, ComponentLink1URL=https://www.lcsc.com/product-detail/C42395330.html?s_z=n_c42395330, ComponentLink2Description="Link 1", Mfr.Part #=SFT018N100C3
R1 R4 R9 R10 R11 R16: library part RC0603FR-071KL, "100mW 1kΩ 75V Thick Film Resistor ±100ppm/℃ ±1% 0603 Chip Resistor - Surface Mount RoHS", DigiKey Part Number=311-1.00KHRTR-ND, LCSC Part #=C22548, Manufacturer=YAGEO, Package=0603, ComponentLink1Description=Link, ComponentLink1URL=https://www.lcsc.com/product-detail/C22548.html?s_z=n_C22548, ComponentLink2Description="Link 1", ComponentLink2URL=https://www.digikey.com/en/products/detail/yageo/RC0603FR-071KL/726843?s=N4IgTCBcDaIEoGEAMA2JBmAYnAtEg7AIwDSAMiALoC%2BQA, Mfr.Part #=RC0603FR-071KL
R2 R3 R5 R6 R7 R8 R12 R13 R14 R15 R17 R18 R29 R30 R31 R42: library part RC0603FR-0710KL, "100mW 10kΩ 75V Thick Film Resistor ±100ppm/℃ ±1% 0603 Chip Resistor - Surface Mount RoHS", DigiKey Part Number=311-10.0KHRTR-ND, LCSC Part #=C98220, Manufacturer=YAGEO, Package=0603, ComponentLink1Description=Link, ComponentLink1URL=https://www.lcsc.com/product-detail/C98220.html?s_z=n_C98220, ComponentLink2Description="Link 1", ComponentLink2URL=https://www.digikey.com/en/products/detail/yageo/RC0603FR-0710KL/726880?s=N4IgTCBcDaIMwEYEFoEAYB0aDSAJASgCr7IByAIiALoC%2BQA, Mfr.Part #=RC0603FR-0710KL
R19 R22 R24 R25 R32 R35 R37 R38: library part 0603WAF2200T5E, "220Ω ±1% 100mW 0603 Thick Film Resistor", DigiKey Part Number=NO, LCSC Part #=C22962, Manufacturer=UNI-ROYAL, Package=0603, ComponentLink1Description=Link, ComponentLink1URL=https://www.lcsc.com/product-detail/C22962.html?s_z=n_0603waf22, ComponentLink2Description="Link 1", Mfr.Part #=0603WAF2200T5E
R20 R21 R33 R34: library part RC0603FR-074K7L, "100mW 4.7kΩ 75V Thick Film Resistor ±100ppm/℃ ±1% 0603 Chip Resistor - Surface Mount RoHS", DigiKey Part Number=311-4.70KHRTR-ND, LCSC Part #=C99782, Manufacturer=YAGEO, Package=0603, ComponentLink1Description=Link, ComponentLink1URL=https://www.lcsc.com/product-detail/C99782.html?s_z=n_4.7K, ComponentLink2Description="Link 1", ComponentLink2URL=https://www.digikey.com/en/products/detail/yageo/RC0603FR-074K7L/727212?s=N4IgTCBcDaIEoGEAMA2JBmAYnAtEg7ACwDS%2BAMiALoC%2BQA, Mfr.Part #=RC0603FR-074K7L
R23 R26 R36 R39: library part FRC0603F6800TS, "680Ω ±1% 100mW 0603 Thick Film Resistor", DigiKey Part Number=NO, LCSC Part #=C2907062, Manufacturer=FOJAN, Package=0603, ComponentLink1Description=Link, ComponentLink1URL=https://www.lcsc.com/product-detail/C2907062.html?s_z=n_680r, ComponentLink2Description="Link 1", Mfr.Part #=FRC0603F6800TS
R27 R28 R40 R41: library part 0603WAF6801T5E, "6.8kΩ ±1% 100mW 0603 Thick Film Resistor", DigiKey Part Number=NO, LCSC Part #=C23212, Manufacturer=UNI-ROYAL, Package=0603, ComponentLink1Description=Link, ComponentLink1URL=https://www.lcsc.com/product-detail/C23212.html?s_z=n_C23212, ComponentLink2Description="Link 1", Mfr.Part #=0603WAF6801T5E
X1: library part X50328MSB4SI, "Crystal 8MHz ±10ppm 20pF SMD5032-4P", DigiKey Part Number=NO, LCSC Part #=C157341, Manufacturer="YXC Crystal Oscillators", Package=SMD5032-4P, ComponentLink1Description=Link, ComponentLink1URL=https://www.lcsc.com/product-detail/C157341.html?s_z=n_c157341, ComponentLink2Description="Link 1", Mfr.Part #=X50328MSB4SI

## Via types
v1: diameter 0.6, hole 0.3, Top Layer to Bottom Layer, tented both sides, 208 vias
v2: diameter 0.7, hole 0.3, Top Layer to Bottom Layer, tented both sides, 142 vias
v3: diameter 0.5, hole 0.3, Top Layer to Bottom Layer, tented both sides, 72 vias
v4: diameter 0.5, hole 0.3, Top Layer to Bottom Layer, 1 vias

## Nets (pads, with @x,y where several pads share a name; then routed paths per layer and width w, separated by ;. In a path a pad name is that pad's centre, name@x,y a point inside that pad or via, vN(x,y) a via of type N, cw(c..) or ccw(c..) an arc to the next point about the centre after c; other vN are vias at no path point)
3.3V: C17.1 C18.1 C19.1 C20.1 C21.1 C23.1 C31.1 C32.1 C35.1 C36.1 CN3.4 CN6.3 CN9.3 CN10.3 IC1.1 IC1.9 IC1.24 IC1.36 IC1.48 IC3.2 IC3.4 IC6.14 IC7.14 IC8.14 IC9.14 R1.1 R3.2 R5.2 R6.2 R7.2 R8.2 R12.2 R13.2 R14.2 R15.2 R16.2 R19.2 R22.1 R24.1 R25.2 R32.2 R35.1 R37.1 R38.2 | length 447.8
  Top Layer w0.25: R7.2@8.4,32.114 8.404,32.11 12.01,32.11 v3(12.014,32.106) ; R14.2@10.033,45.182 10.056,45.159 12.067,45.159 v3@12.09,45.136 ; R15.2@10.033,51.124 10.043,51.114 11.294,51.114 v3(11.303,51.105) ; v3@26.543,36.347 26.551,36.356 R3.2@26.551,37.702 26.603,37.702 28.303,39.402 C18.1@28.355,39.402 28.359,39.406 32.257,39.406 IC1.9@32.261,39.41 ; IC1.1@32.261,43.41 32.261,45.059 ; C20.1@32.261,48.306 32.261,45.059 ; R12.2@33.87,7.537 40.38,7.537 43.559,4.358 43.559,0.928 ; IC1.48@33.893,45.06 32.262,45.06 32.261,45.059 ; IC1.24@39.393,36.26 C21.1@43.358,36.26 ; IC1.36@41.061,43.41 C17.1@44.577,43.41
  Top Layer w0.3: R1.1@8.744,5.559 8.753,5.559 9.023,5.29 9.023,5.281 10.236,4.067 10.236,2.311 11.62,0.928 19.143,0.928 ; R6.2@19.099,7.537 19.099,0.972 19.143,0.928 ; R8.2@26.936,7.537 R13.2@28.669,7.537 28.669,5.951 30.298,4.322 30.298,0.928 ; CN6.3@48.489,2.692 48.489,0.935 48.482,0.928 ; CN9.3@61.316,2.692 61.316,0.928 ; CN10.3@74.117,2.692 74.117,0.928 ; R16.2@90.625,0.928 74.117,0.928 ; 19.143,0.928 30.298,0.928 ; 30.298,0.928 43.559,0.928 48.482,0.928 ; 48.482,0.928 61.316,0.928 ; 61.316,0.928 74.117,0.928
  Top Layer w0.4: R5.2@8.396,55.628 v3(11.303,55.628) 11.303,59.449 13.038,61.185 13.038,61.194 13.354,61.51 C32.1@13.363,61.51 ; R19.2@10.587,64.846 10.587,63.733 11.024,63.297 13.368,63.297 ; IC7.14@15.053,61.51 C32.1@13.363,61.51 ; R25.2@22.525,64.846 22.525,63.317 22.504,63.297 ; IC6.14@27.053,61.51 C31.1@25.363,61.51 25.363,63.295 25.362,63.297 ; R24.1@34.463,64.846 34.463,63.298 34.464,63.297 ; R22.1@47.29,64.846 47.29,63.301 47.286,63.297 ; R32.2@59.99,64.846 59.99,63.312 59.974,63.297 ; C23.1@64.033,27.599 66.029,27.599 66.904,28.473 66.904,43.51 72.542,49.149 82.982,49.149 87.936,54.104 87.936,63.297 ; IC9.14@65.618,61.51 C35.1@63.928,61.51 63.928,63.294 63.925,63.297 ; R38.2@71.801,64.846 71.801,63.308 71.813,63.297 ; IC8.14@77.618,61.51 C36.1@75.928,61.51 75.928,63.293 75.932,63.297 ; 83.646,63.297 87.936,63.297 ; R37.1@83.646,64.846 83.646,63.301 83.643,63.297 75.932,63.297 ; R35.1@96.693,64.846 96.693,64.837 96.424,64.567 96.414,64.567 95.144,63.297 87.936,63.297 ; C32.1@13.363,61.51 13.363,63.292 13.368,63.297 ; 13.368,63.297 22.504,63.297 ; 22.504,63.297 25.362,63.297 ; 25.362,63.297 34.464,63.297 ; 34.464,63.297 47.286,63.297 ; 47.286,63.297 59.974,63.297 ; 59.974,63.297 63.925,63.297 ; 63.925,63.297 71.813,63.297 ; 71.813,63.297 75.932,63.297
  Top Layer w0.5: C20.1@32.261,48.306 C19.1@32.261,49.652 v3(35.899,49.652) ; v3@39.929,49.682 43.234,49.682 44.577,48.339 C17.1@44.577,43.41 ; C21.1@43.358,36.26 44.284,36.26 44.577,35.967 v4(44.577,35.484) ; CN3.4@53.78,37.46 63.253,27.987 63.645,27.987 C23.1@64.033,27.599
  Bottom Layer w0.25: v3@11.303,55.575 v3(11.303,51.105) 12.052,50.355 v3@12.052,45.098 ; v3(12.014,32.106) v3(12.014,45.136)
  Bottom Layer w0.3: C23.1@64.033,27.599 64.125,27.599 64.66,27.064 64.66,26.972 71.069,20.563 71.069,9.195 74.117,6.147 CN10.3@74.117,2.692
  Bottom Layer w0.5: v3(26.543,36.297) 44.577,36.297 ; v3(35.899,49.652) v3(39.929,49.652) ; v4(44.577,35.484) 44.577,36.297 ; v3(44.577,44.501) 44.577,36.297 ; CN3.4@53.78,37.46 53.68,37.46 52.517,36.297 44.577,36.297
3.3V-REF: C12.1 C25.1 C27.1 IC4.2 IC4.4 M1.6
5V: C22.1 C24.1 C26.1 C28.1 C29.1 CN11.1 CN12.1 IC3.3 IC4.3 IC5.4 L2.2 R4.1 | length 87.4
  Bottom Layer w0.5: CN12.1@2.894,44.33 3.219,44.33 10.516,37.033 10.516,19.955 23.994,6.477 40.742,6.477 ; CN11.1@40.742,2.692 40.742,6.477 ; C26.1@58.369,12.294 58.369,12.148 57.927,11.705 57.781,11.705 52.553,6.477 40.742,6.477
12V: C3.1 C4.1 C6.1 C7.1 C15.1 C16.1 CN4.3 CN5.3 CN7.3 CN8.3 IC2.4 IC5.1 L1.2 R23.2 R26.2 R36.2 R39.2 | length 265
  Top Layer w0.5: C6.1@8.4,38.919 CN7.3@2.969,38.919 2.669,38.919 0.991,40.597 0.991,60.781 2.669,62.459 CN4.3@2.969,62.459 2.988,62.439 8.388,62.439 C3.1@8.407,62.42 ; CN5.3@12.319,2.769 C4.1@12.319,7.537 ; R26.2@16.845,64.846 16.845,64.896 19.44,67.491 v3(19.44,71.222) ; CN8.3@22.758,2.769 C7.1@22.758,7.537 ; R23.2@28.783,64.846 28.783,64.896 30.323,66.436 v3(30.323,71.222) ; R39.2@66.121,64.846 66.121,64.896 68.817,67.592 v3(68.817,71.222) ; R36.2@77.966,64.846 77.966,64.896 79.375,66.305 v3(79.375,71.222)
  Bottom Layer w0.5: CN7.3@2.969,38.919 3.269,38.919 8.915,33.272 8.915,9.572 10.131,8.357 12.319,8.357 ; CN4.3@2.969,62.459 2.971,62.459 3.715,63.202 3.715,63.205 11.732,71.222 v3(19.44,71.222) v3(30.323,71.222) v3(68.817,71.222) v3(79.375,71.222) 85.293,71.222 87.936,68.578 87.936,41.992 76.08,30.136 76.08,30.021 75.35,29.29 C15.1@75.235,29.29 ; CN5.3@12.319,2.769 12.319,8.357 ; CN8.3@22.758,2.769 22.758,5.392 19.793,8.357 12.319,8.357
  other v2: 83.271,17.755 84.371,17.78 85.471,17.78 83.279,18.745 84.379,18.771 85.479,18.771 74.922,27.457 76.022,27.483 77.122,27.483
BOOT0: IC1.44 R2.1 | length 3.2
  Top Layer w0.25: IC1.44@35.893,45.06 R2.1@35.893,48.255
Dung1: CN7.1 IC1.43 R7.1 | length 55.1
  Top Layer w0.2: CN7.1@2.969,33.839 2.994,33.814 R7.1@8.4,33.814 14.51,33.814 15.596,34.9 15.596,49.657 16.733,50.795 36.28,50.795 36.788,50.287 36.788,47.583 36.393,47.188 IC1.43@36.393,45.06
Dung2: CN4.1 IC1.42 R5.1 | length 47.2
  Top Layer w0.2: CN4.1@2.969,57.379 3.019,57.328 6.612,57.328 ; R5.1@8.396,57.328 6.612,57.328 ; IC1.42@36.893,45.06 36.893,46.672 37.567,47.346 37.567,50.778 36.808,51.537 13.106,51.537 12.065,52.578 7.874,52.578 6.604,53.848 6.604,57.32 6.612,57.328